# Altium PCB PCB1.PcbDoc
Units mil, origin at the board's own origin, x right, y up, seen from the top; angles counter-clockwise.
Board outline 6000 x 4000 mil, 2 copper layers (Top Layer, Bottom Layer); 10 components, 10 nets, 63 pads, 0 vias.
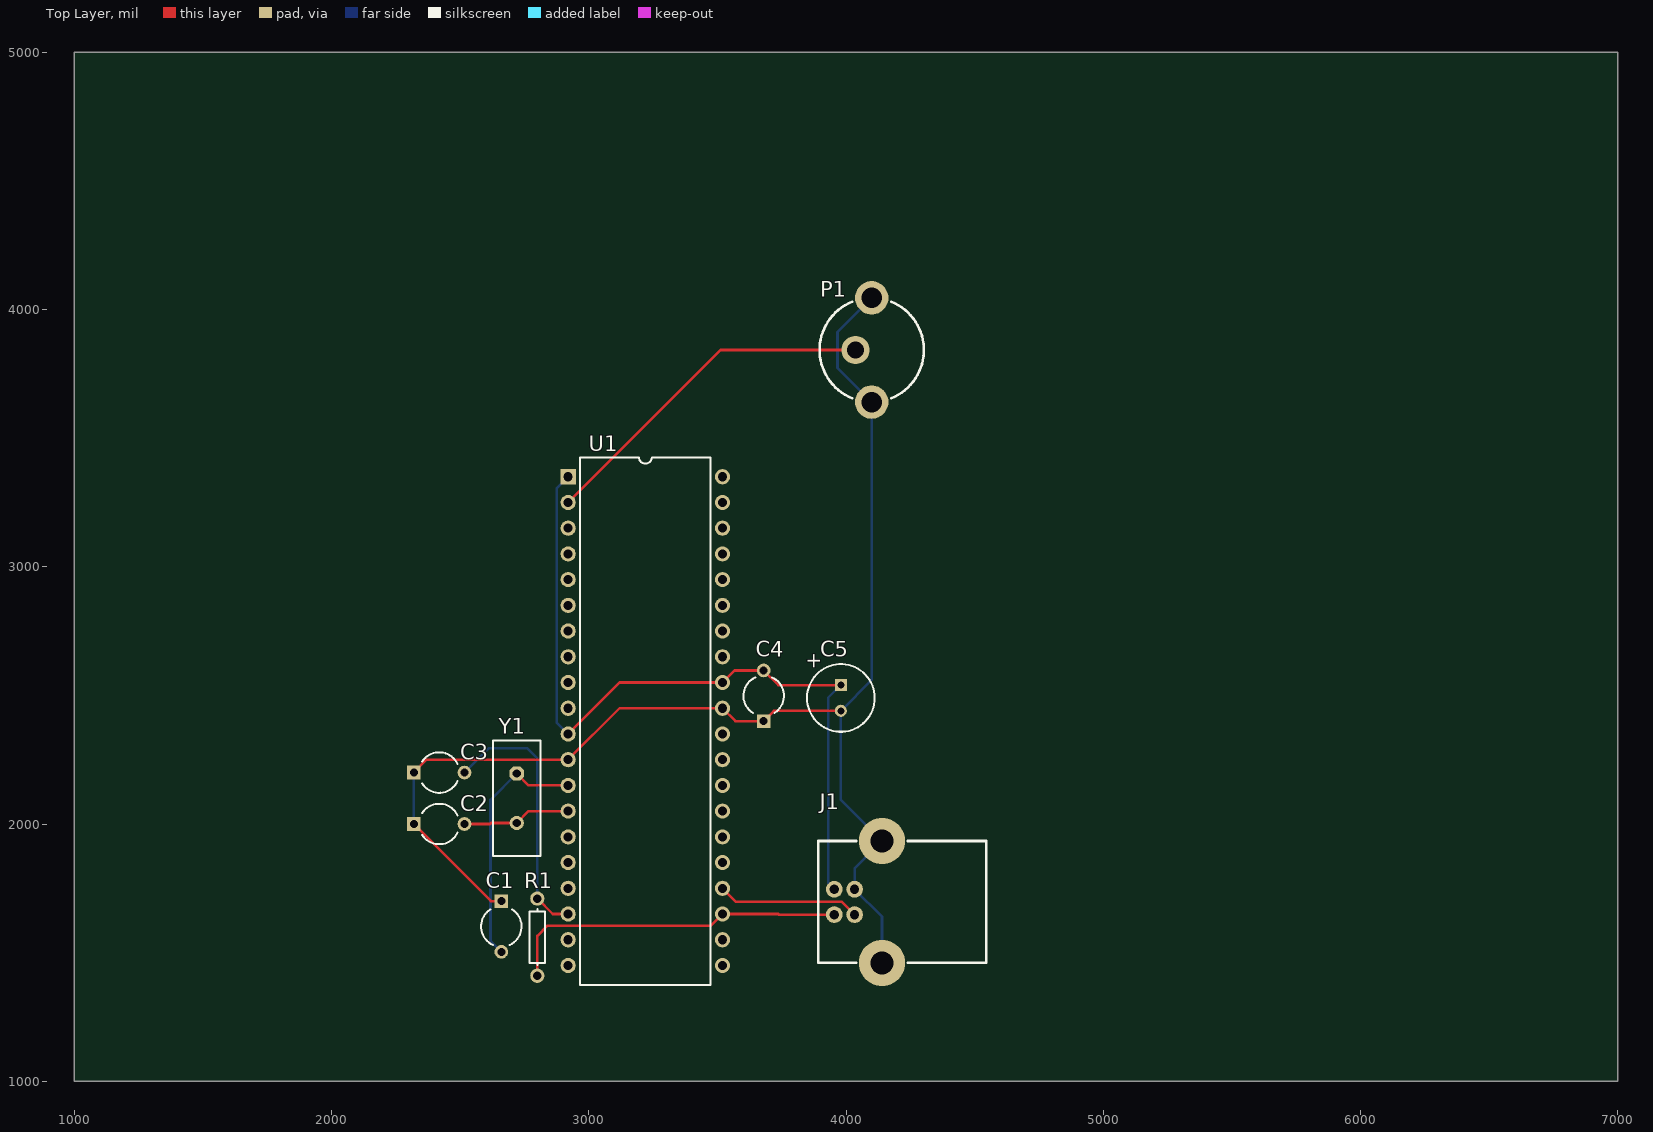
[diagram p0: Top Layer view]
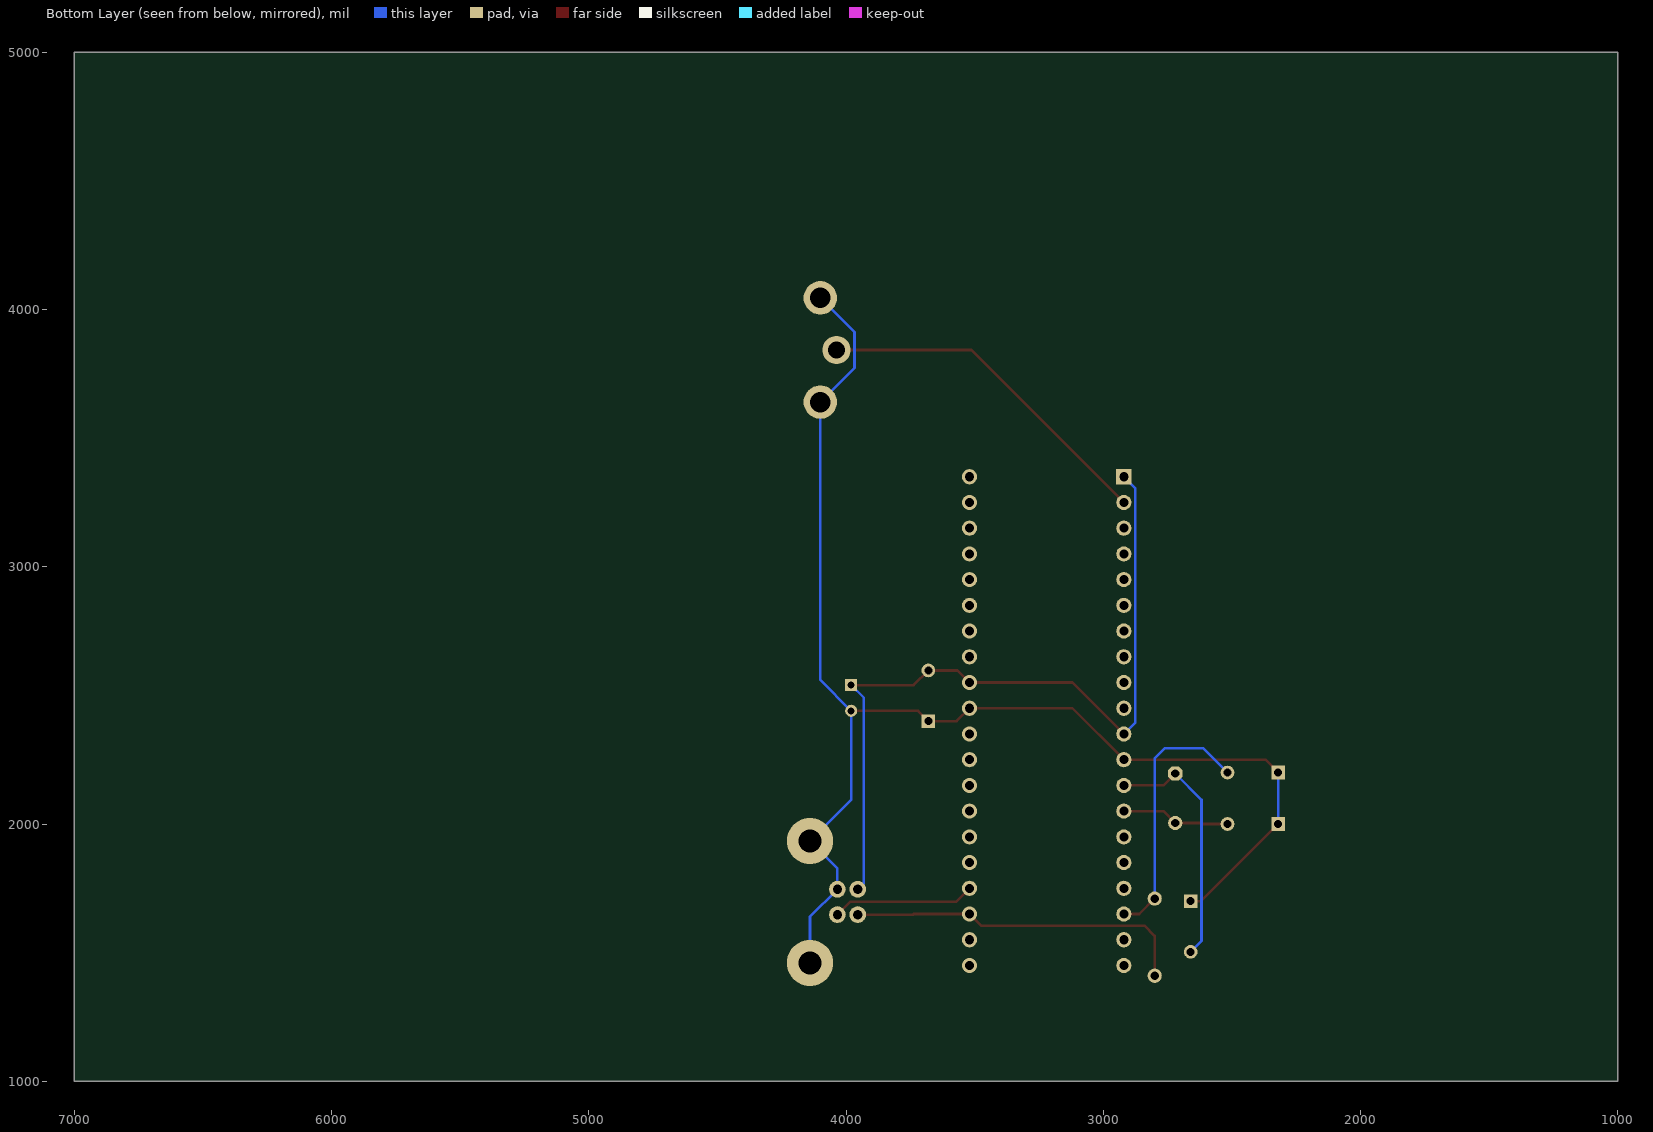
[diagram p1: Bottom Layer view, seen from below]

## Layer stack, top to bottom
Top Layer: signal copper 1.4
Dielectric: dielectric 12.6, FR-4, Dk 4.8
Bottom Layer: signal copper 1.4

## Board outline
1000,1000 7000,1000 7000,5000 1000,5000

## Design rules (kind name [scope] priority, off if disabled: settings)
Clearance [All] p1: gap=10
ComponentClearance [All] p1: gap=10 collisioncheckmode=0
PolygonConnect [All] p1: connectstyle=Relief reliefconductorwidth=10 reliefentries=4 polygonreliefangle="90 Angle"
RoomDefinition Sheet1 [InComponentClass('Sheet1')] p1: confinementstyle=ConfineIn formatcopy=TRUE outline 0,0 2000,0 2000,1000 0,1000
RoutingLayers [All] p1: top layer=Horizontal bottom layer=Vertical
RoutingVias [All] p1: holewidth=28 width=50 viastyle="Through Hole" minholewidth=28 minwidth=50 maxholewidth=28 maxwidth=50
SolderMaskExpansion [All] p1: expansion=4
TestPointUsage [All] p1: valid=0 allowmultiple=FALSE
Testpoint [All] p1: side=15 testpointundercomponent=TRUE minsize=40 maxsize=100 preferedsize=60 minholesize=0 maxholesize=40 preferedholesize=32 testpointgrid=1 style=1023 order=-539222988
Width [All] p1: maxlimit=10 minlimit=10 preferedwidth=10
16 further rules are at their usual default settings.

## Components (designator, comment, footprint, x,y, rotation, side; value= is the part's Value field where it differs from the comment)
C1 "Cap2" CAPR5-4X5 2660,1700 r270 top
C2 "Cap2" CAPR5-4X5 2320,2000 r0 top
C3 "" CAPR5-4X5 2320,2200 r0 top
C4 "" CAPR5-4X5 3680,2400 r90 top
C5 "" CAP-EE-1 3980,2640 r90 top
J1 "USB" USB-TYPEB 4140,1460 r90 top
P1 "RCA" RCJ-02X 4100,3640 r90 top
R1 "Res1" AXIAL-0.3 2800,1560 r270 top
U1 "PIC16C765" DIP-40 3220,2400 r270 top
Y1 "XTAL" BCY-W2/E4.7 2720,2100 r270 top

## Footprints (in the part's own frame and the unit in brackets; to place one, negate y for a bottom-side part, rotate by r counter-clockwise, add the part's x,y. Pads: shape width x height; smd on the part's side, far side on the other; paste and mask are expansions set on the pad)
AXIAL-0.3 [mm]
  round 1.4 hole 0.85: 1(-3.81,0) 2(3.81,0)
  silkscreen extent -2.77,-0.76 2.77,0.76
BCY-W2/E4.7 [mm]
  oct 1.4x1.4 hole 0.8: 1(-2.44,0)
  round 1.4 hole 0.8: 2(2.44,0)
  silkscreen extent -5.7,-2.35 5.7,2.35
CAP-EE-1 [mm]
  rect 1.2x1.2 hole 0.7: 1(-2.54,0)
  round 1.2 hole 0.7: 2(-5.08,0)
  silkscreen extent -7.15,-3.34 -0.47,3.34
CAPR5-4X5 [mm]
  rect 1.35x1.35 hole 0.8: 1(0,0)
  round 1.35 hole 0.8: 2(5,0)
  silkscreen extent 0.81,-2 4.32,2
DIP-40 [mm]
  rect 1.5x1.5 hole 0.9: 1(-24.13,-7.62)
  round 1.5 hole 0.9: 2(-21.59,-7.62) 3(-19.05,-7.62) 4(-16.51,-7.62) 5(-13.97,-7.62) 6(-11.43,-7.62) 7(-8.89,-7.62) 8(-6.35,-7.62) 9(-3.81,-7.62) 10(-1.27,-7.62) 11(1.27,-7.62) 12(3.81,-7.62) 13(6.35,-7.62) 14(8.89,-7.62) 15(11.43,-7.62) 16(13.97,-7.62) 17(16.51,-7.62) 18(19.05,-7.62) 19(21.59,-7.62) 20(24.13,-7.62) 21(24.13,7.62) 22(21.59,7.62) 23(19.05,7.62) 24(16.51,7.62) 25(13.97,7.62) 26(11.43,7.62) 27(8.89,7.62) 28(6.35,7.62) 29(3.81,7.62) 30(1.27,7.62) 31(-1.27,7.62) 32(-3.81,7.62) 33(-6.35,7.62) 34(-8.89,7.62) 35(-11.43,7.62) 36(-13.97,7.62) 37(-16.51,7.62) 38(-19.05,7.62) 39(-21.59,7.62) 40(-24.13,7.62)
  silkscreen extent -26.05,-6.45 26.05,6.45
RCJ-02X [mil]
  round 110 hole 66.93: 1(202.76,62.99)
  round 130 hole 78.74: 2(0,0) 2(405.51,0)
  silkscreen extent 15,-203 391,203
USB-TYPEB [mil]
  round 65 hole 36.22: 1(286.22,185.43) 2(187.8,185.43) 3(187.8,106.69) 4(286.22,106.69)
  round 180 hole 90.55: 5(0,0) 5(474.02,0)
  silkscreen extent 0,-406 474,248

## Part data
C1 C2: "Capacitor"
C3 C4: library part Cap2, "Capacitor"
C5: library part "Cap Pol1", "Polarized Capacitor (Radial)"
J1: library part "USB Type B", "Header, 4-Pin"
P1: "RCA Connector"
R1: "Resistor"
U1: "EPROM-Based 8-Bit CMOS Microcontroller with USB"
Y1: "Crystal Oscillator"

## Nets (pads, with @x,y where several pads share a name; then routed paths per layer and width w, separated by ;. In a path a pad name is that pad's centre, name@x,y a point inside that pad or via, vN(x,y) a via of type N, cw(c..) or ccw(c..) an arc to the next point about the centre after c; other vN are vias at no path point)
GND: C1.1 C2.1 C3.1 C4.1 C5.2 J1.4 J1.5 P1.2 U1.12 U1.31 | length 5365.2
  Top Layer w10: C2.1 2620,1700 C1.1 ; C3.1 2370,2250 U1.12 3120,2450 U1.31 3570,2400 C4.1 3720,2440 C5.2
  Bottom Layer w10: C2.1 C3.1 ; P1.2@4100,4045.51 3967,3912.51 3967,3773 4100,3640 4100,2560 C5.2 3980,2094.02 4140,1934.02 4033.31,1827.32 J1.4 4140,1639.53 J1.5@4140,1460
NetC1_2: C1.2 U1.13 Y1.1 | length 971.6
  Top Layer w10: Y1.1 2766.06,2150 U1.13
  Bottom Layer w10: C1.2 2618,1545.15 2618,2094.06 Y1.1
NetC2_2: C2.2 U1.14 Y1.2 | length 423.9
  Top Layer w10: C2.2 2616,2000 2619.94,2003.94 Y1.2 2766.06,2050 U1.14
NetC3_2: C3.2 R1.1 U1.18 | length 1028.9
  Top Layer w10: R1.1 2860,1650 U1.18
  Bottom Layer w10: C3.2 2611.85,2295 2760,2295 2800,2255 R1.1
NetJ1_2: J1.2 R1.2 U1.23 | length 1345.7
  Top Layer w10: R1.2 2800,1565 2840,1605 3475,1605 U1.23 3736,1650 3738.2,1647.8 J1.2
NetJ1_3: J1.3 U1.24 | length 555.6
  Top Layer w10: U1.24 3573,1697 3984.1,1697 J1.3
NetP1_1: P1.1 U1.2 | length 1362.5
  Top Layer w10: U1.2 3512.76,3842.76 P1.1
NetU?_13: 
NetU?_14: 
VCC: C4.2 C5.1 J1.1 U1.1 U1.11 U1.32 | length 3046.9
  Top Layer w10: U1.11 3120,2550 U1.32 3566.85,2596.85 C4.2 3736.85,2540 C5.1
  Bottom Layer w10: U1.11 2875,2395 2875,3305 U1.1 ; J1.1 3931,1769.79 3931,2491 C5.1
pads on no net: U1.3 U1.4 U1.5 U1.6 U1.7 U1.8 U1.9 U1.10 U1.15 U1.16 U1.17 U1.19 U1.20 U1.21 U1.22 U1.25 U1.26 U1.27 U1.28 U1.29 U1.30 U1.33 U1.34 U1.35 U1.36 U1.37 U1.38 U1.39 U1.40

## Text inside footprints (layer, text, board x,y; h text height)
C5: Top Overlay "+" at 3900,2600 h59.06 r90